# Altium PCB PCB1.PcbDoc
Units mm, origin at the board's own origin, x right, y up, seen from the top; angles counter-clockwise.
Board outline 27 x 27 mm, 2 copper layers (Top Layer, Bottom Layer); 8 components, 6 nets, 33 pads, 6 vias.
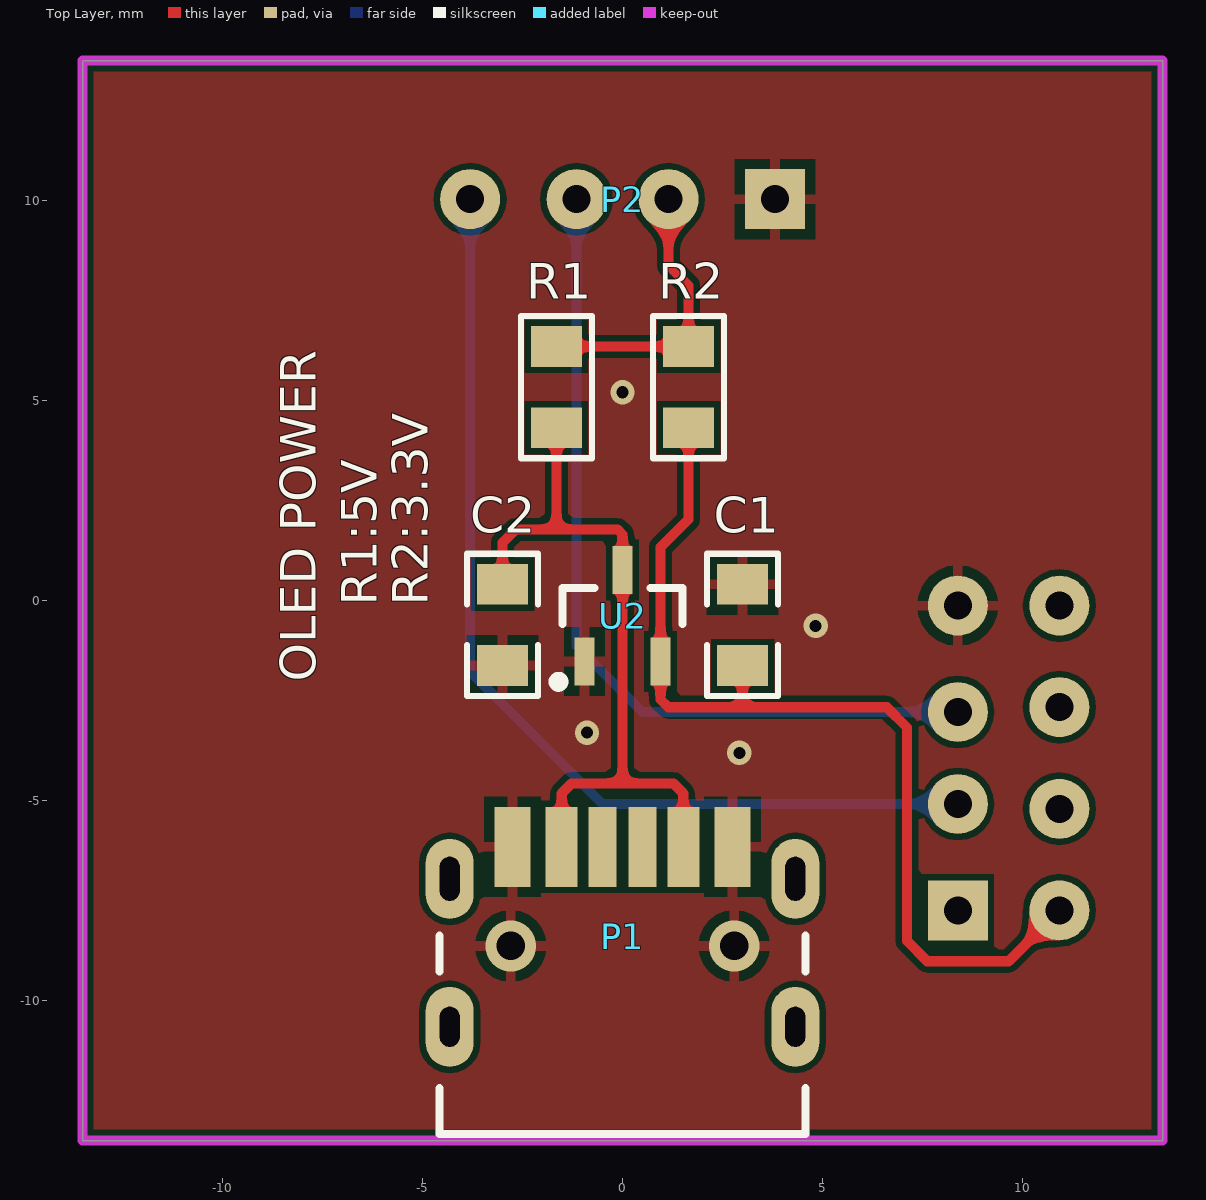
[diagram p0: Top Layer view]
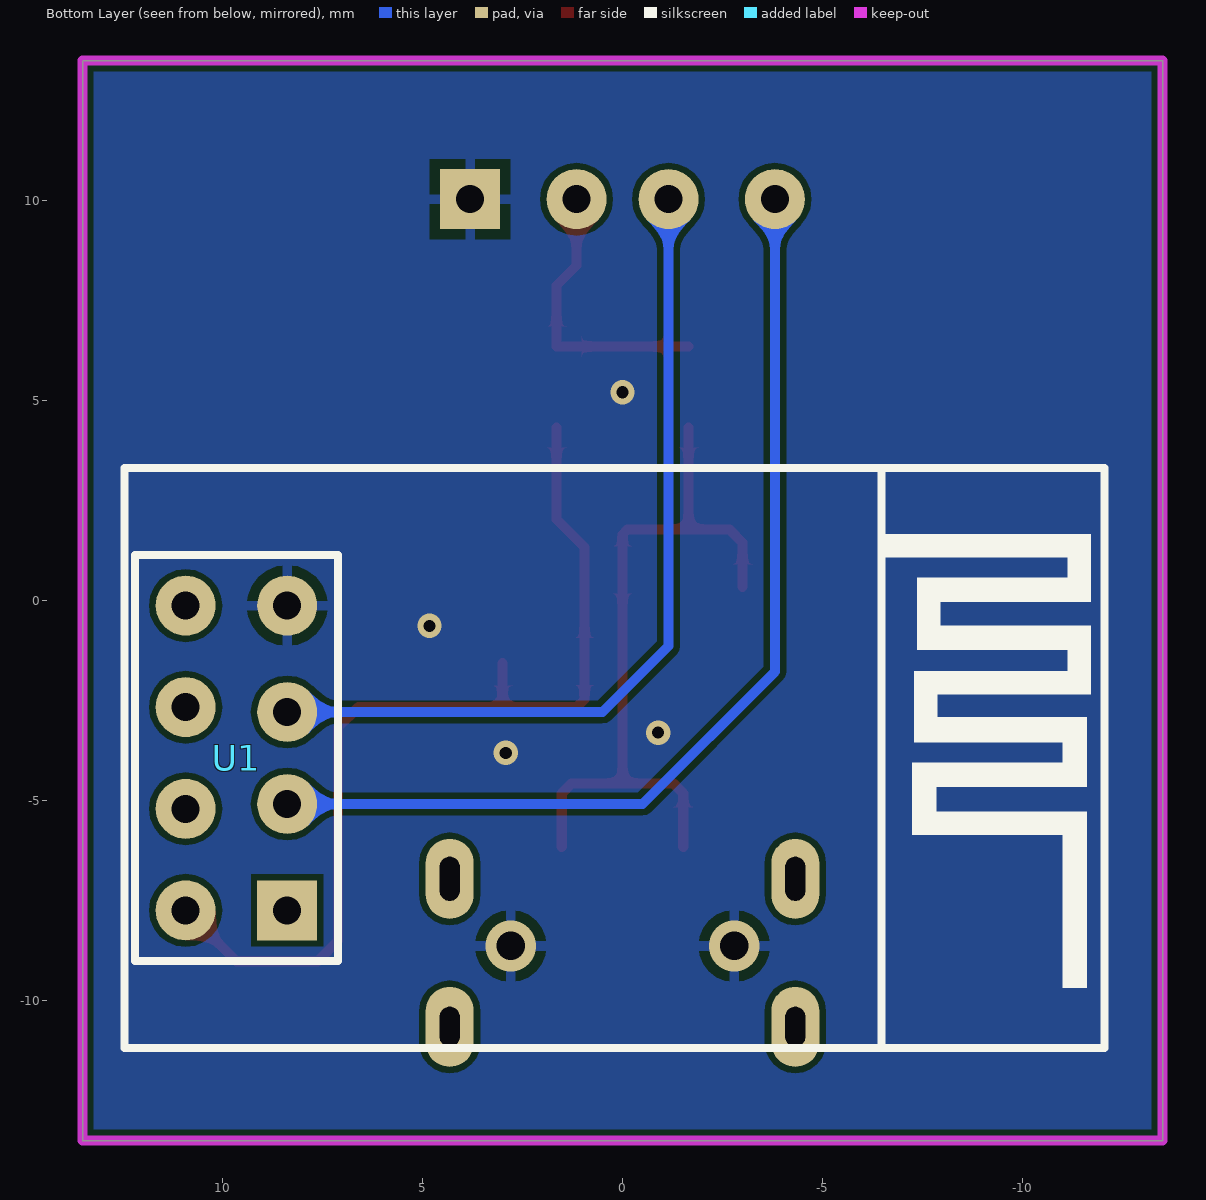
[diagram p1: Bottom Layer view, seen from below]
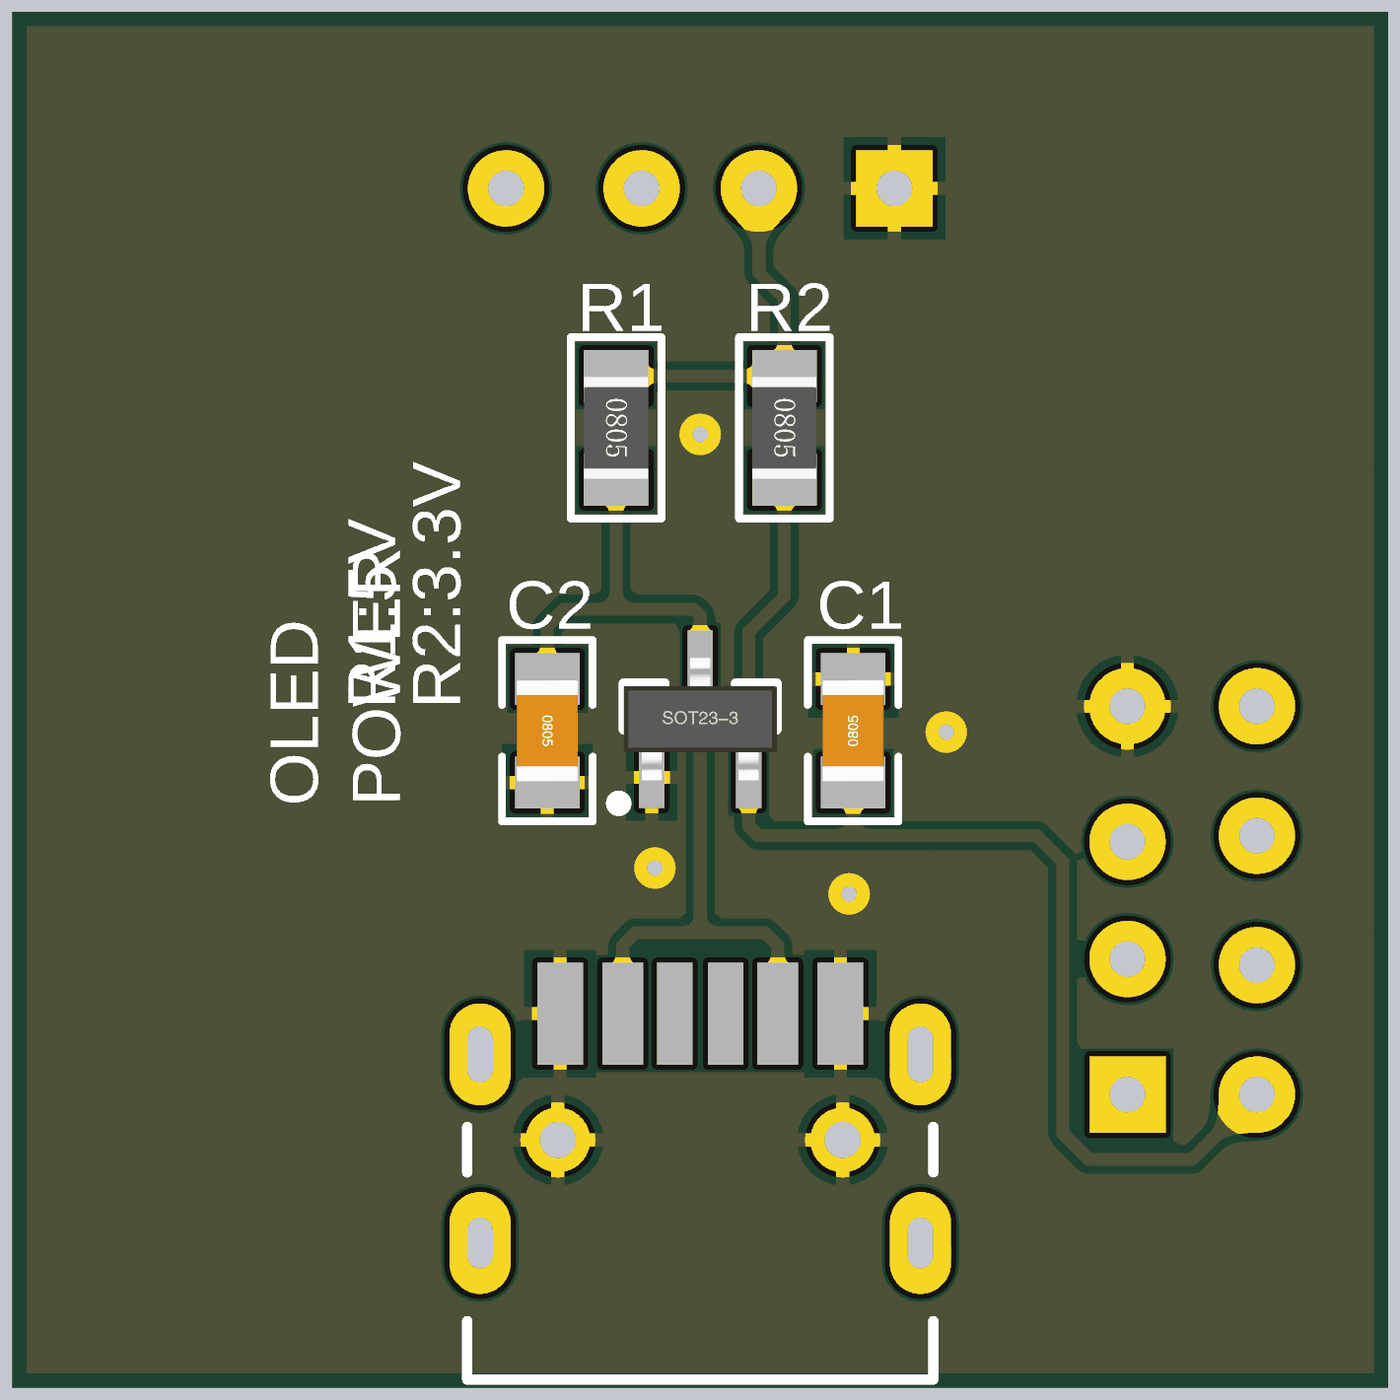
[diagram p2: 3D render of the assembled board from above, using the file's embedded part models]

## Layer stack, top to bottom
Top Solder: solder mask 0.0102, Solder Resist, Dk 3.5
Top Layer: signal copper 0.0356
Dielectric 1: dielectric 0.32, FR-4, Dk 4.8
Bottom Layer: signal copper 0.0356
Bottom Solder: solder mask 0.0102, Solder Resist, Dk 3.5

## Board outline
-13.5,-13.5 -13.5,13.5 13.5,13.5 13.5,-13.5

## Design rules (kind name [scope] priority, off if disabled: settings)
AssemblyTestPointUsage [All] p1 off:
AssemblyTestpoint [All] p1 off: testpointundercomponent=TRUE minsize=1.016 maxsize=2.54 preferedsize=1.524 minholesize=0 maxholesize=1.016 preferedholesize=0.813 testpointgrid=0.025 usegrid=TRUE gridtolerance=0 allowsidetop=TRUE allowsidebottom=TRUE
Clearance [All] p1: gap=0.152
ComponentClearance [All] p1 off: gap=0.254 collisioncheckmode=3 verticalgap=0.254 showdistances=FALSE
FabricationTestPointUsage [All] p1 off: valid=0 allowmultiple=FALSE
FabricationTestpoint [All] p1 off: side=3 testpointundercomponent=TRUE minsize=1.016 maxsize=2.54 preferedsize=1.524 minholesize=0 maxholesize=1.016 preferedholesize=0.813 testpointgrid=0.025 allowsidetop=TRUE allowsidebottom=TRUE usegrid=TRUE gridtolerance=0
Height [All] p1 off: minheight=0 maxheight=25.4 prefheight=12.7
HoleSize [All] p1 off: absolutevalues=TRUE maxlimit=2.54 minlimit=0.025 maxpercent=80.000 minpercent=20.000
HoleToHoleClearance [All] p1 off: gap=0.254 allowstackedmicrovias=TRUE
LayerPairs [All] p1 off: enforce=TRUE
MinimumSolderMaskSliver [All] p1 off: minsoldermaskwidth=0.254
NetAntennae [All] p1 off: netantennaetolerance=0
PasteMaskExpansion [All] p1 off: expansion=0
PlaneClearance [All] p1 off: clearance=0.508
PlaneConnect [All] p1 off: planeconnectstyle=Relief reliefexpansion=0.508 reliefentries=4 reliefconductorwidth=0.254 reliefairgap=0.254
PolygonConnect [IsVia] p1 off: connectstyle=Direct reliefconductorwidth=0.254 reliefentries=4 polygonreliefangle="90 Angle" airgapwidth=0.254
PolygonConnect PolygonConnect_1 [All] p2: connectstyle=Relief reliefconductorwidth=0.254 reliefentries=4 polygonreliefangle="90 Angle" airgapwidth=0.254
RoutingVias [All] p1: holewidth=0.711 width=1.27 viastyle="Through Hole" minholewidth=0.305 minwidth=0.61 maxholewidth=0.711 maxwidth=1.27
SilkToSilkClearance [All] p1 off: silktosilkclearance=0.254
SilkToSolderMaskClearance [IsPad] p1 off: minsilkscreentomaskgap=0.254 clearancetoexposedcopper=TRUE
SolderMaskExpansion [All] p1 off: expansion=0.102
Width [All] p1: maxlimit=0.762 minlimit=0.152 preferedwidth=0.254
14 further rules are at their usual default settings.

## Components (designator, comment, footprint, x,y, rotation, side; value= is the part's Value field where it differs from the comment)
C1 "Value" "C 0805" 3,-0.609 r90 top
C2 "Value" "C 0805" -3,-0.609 r270 top
P1 "TYPE-C(6PIN)" USB-C/S_C 0,-13.208 r0 top
P2 "OLED" P4 0,10.033 r180 top
R1 "0R" "R 0805" -1.651,5.334 r270 top
R2 "0R" "R 0805" 1.651,5.334 r270 top
U1 "ESP-01S" "ESP-01&01S Module" 9.652,-3.937 r270 bottom
U2 "662K" SOT23-3N 0,-0.381 r0 top

## Footprints (in the part's own frame and the unit in brackets; to place one, negate y for a bottom-side part, rotate by r counter-clockwise, add the part's x,y. Pads: shape width x height; smd on the part's side, far side on the other; paste and mask are expansions set on the pad)
"C 0805" [mil] "贴片带丝印"
  rect 40x50 smd: 1(-40,0) 2(40,0)
  silkscreen extent -70,-35 70,35, body extent -39,-24 39,24, height 20
"ESP-01&01S Module" [mm]
  rect 1.5x1.5 hole 0.7: 1(3.81,1.27)
  round 1.5 hole 0.7: 2(1.15,1.27) 3(-1.15,1.27) 4(-3.81,1.27) 5(3.81,-1.27) 6(1.27,-1.27) 7(-1.27,-1.27) 8(-3.81,-1.27)
  silkscreen extent -7.25,-2.79 7.25,21.71
P4 [mm]
  rect 1.5x1.5 hole 0.7: 1(-3.81,0)
  round 1.5 hole 0.7: 2(-1.15,0) 3(1.15,0) 4(3.81,0)
"R 0805" [mil] "贴片带丝印"
  rect 40x50 smd: 1(-40,0) 2(40,0)
  silkscreen extent -70,-35 70,35, body extent -39,-25 39,25, height 22
SOT23-3N [mm] "3x1.3x1mm(长宽高)"
  rect 0.5x1.2 smd: 1(-0.95,-1.143) 2(0.95,-1.143) 3(0,1.143)
  silkscreen extent -1.72,-1.78 1.5,0.7, body extent -1.5,-1.2 1.5,1.2, height 1.05
USB-C/S_C [mm] "Type-C 6P母座"
  oval 1.2x2 hole 0.5 slot 1 at 90 deg: 0(-4.32,2.55) 0(4.32,2.55)
  oval 1.2x2 hole 0.5 slot 1.1 at 90 deg: 0(-4.32,6.25) 0(4.32,6.25)
  rect 0.7x2 smd: A5(-0.5,7.05) B5(0.5,7.05)
  rect 0.8x2 smd: A9(1.52,7.05) B9(-1.52,7.05)
  rect 0.9x2 smd: A12(2.75,7.05) B12(-2.75,7.05)
  silkscreen extent -4.57,-0.13 4.57,4.83, body extent -4.47,0 4.48,7.05, height 3.16

## Part data
C1 C2: library part Cap1, "无极性电容"
R1 R2: library part Res, "电阻"

## Via types
v1: diameter 0.61, hole 0.305, Top Layer to Bottom Layer, 4 vias
v2: diameter 1.27, hole 0.711, Top Layer to Bottom Layer, 2 vias

## Nets (pads, with @x,y where several pads share a name; then routed paths per layer and width w, separated by ;. In a path a pad name is that pad's centre, name@x,y a point inside that pad or via, vN(x,y) a via of type N, cw(c..) or ccw(c..) an arc to the next point about the centre after c; other vN are vias at no path point)
3V3: C1.1 R2.2 U1.5 U2.2 | length 24.5
  Top Layer w0.254: R2.2 1.651,2.032 0.95,1.331 U2.2 0.95,-2.474 1.143,-2.667 3,-2.667 ; C1.1@3,-1.559 3,-2.667 ; U1.5 9.652,-9.017 7.62,-9.017 7.112,-8.509 7.112,-3.175 6.604,-2.667 3,-2.667
5V: C2.1 P1.A9 P1.B9 R1.2 U2.3 | length 19
  Top Layer w0.254: C2.1@-3,0.341 -3,1.445 -2.667,1.778 -1.651,1.778 ; R1.2 -1.651,1.778 ; P1.B9 -1.52,-4.822 -1.27,-4.572 0,-4.572 ; P1.A9 1.52,-4.822 1.27,-4.572 0,-4.572 ; -1.651,1.778 -0.127,1.778 0,1.651 U2.3 0,-4.572
GND: C1.2 C2.2 P1.A12 P1.B12 P2.1 U1.4 U2.1
  other v1: 2.921,-3.81 -0.889,-3.302 4.826,-0.635 0,5.207
  other v2: -2.794,-8.636 2.794,-8.636
NetP2_3: P2.3 U1.3 | length 21.4
  Bottom Layer w0.254: P2.3 -1.15,-1.136 0.501,-2.787 U1.3
NetP2_4: P2.4 U1.2 | length 25.4
  Bottom Layer w0.254: P2.4 -3.81,-1.778 -0.501,-5.087 U1.2
OLED_VCC: P2.2 R1.1 R2.1 | length 7.2
  Top Layer w0.254: R1.1 R2.1 1.651,7.874 1.15,8.375 P2.2
pads on no net: P1.0 P1.A5 P1.B5 U1.1 U1.6 U1.7 U1.8

## Polygon pours and split planes (outlines as drawn)
GND on Top Layer "Top Layer-No Net" (solid, remove dead copper, pour order 4): -13.5,13.5 13.5,13.5 13.5,-13.5 -13.5,-13.5
GND on Bottom Layer "Top Layer-No Net" (solid, remove dead copper, pour order 6): -13.5,13.5 13.5,13.5 13.5,-13.5 -13.5,-13.5

## Keep-outs
Keep-Out Layer:
  the board outline again, w0.254

## Silkscreen, mask and mechanical layers (free items; w line width, h text height)
Top Overlay:
  text "R1:5V" at -5.842,-0.127 h1.52 r90
  text "R2:3.3V" at -4.572,-0.127 h1.52 r90
  text "OLED POWER" at -7.366,-2.032 h1.52 r90